# EAGLE board Timer_Module (EAGLE 7.2.0)
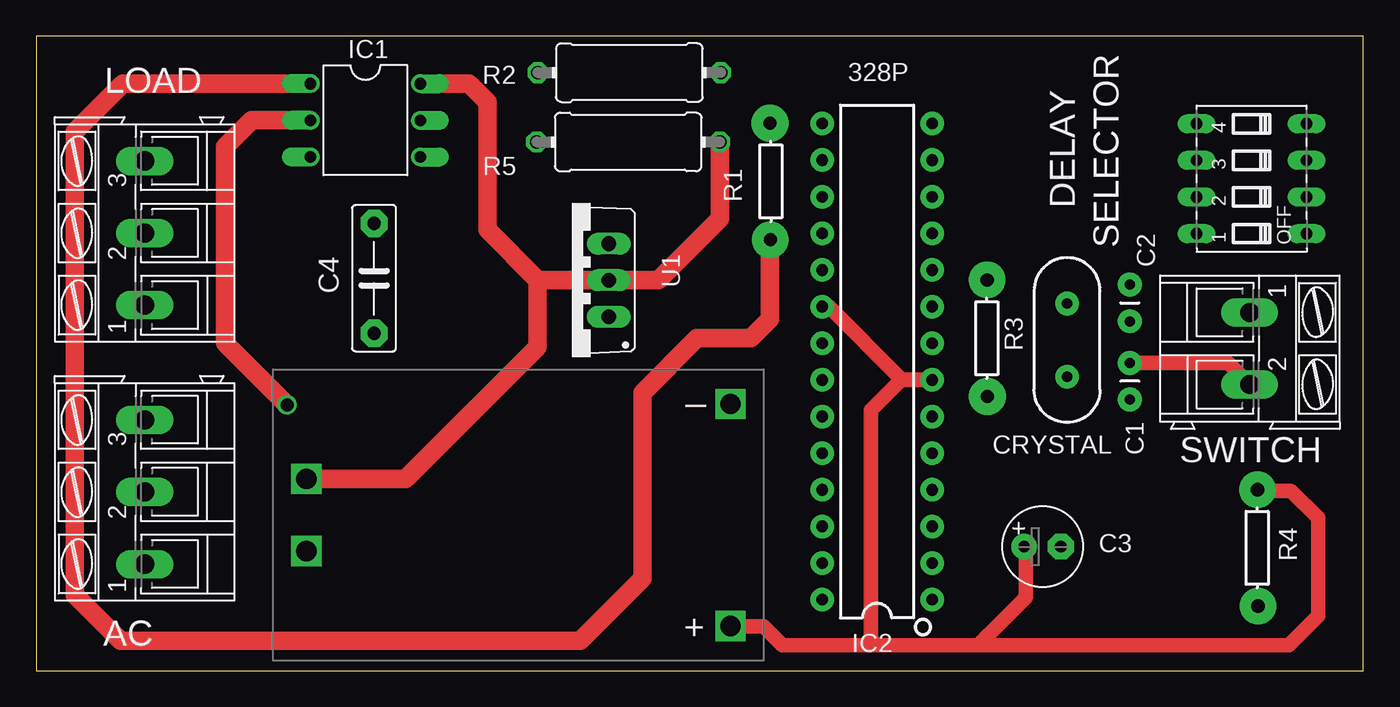
[diagram p0: board, top side]
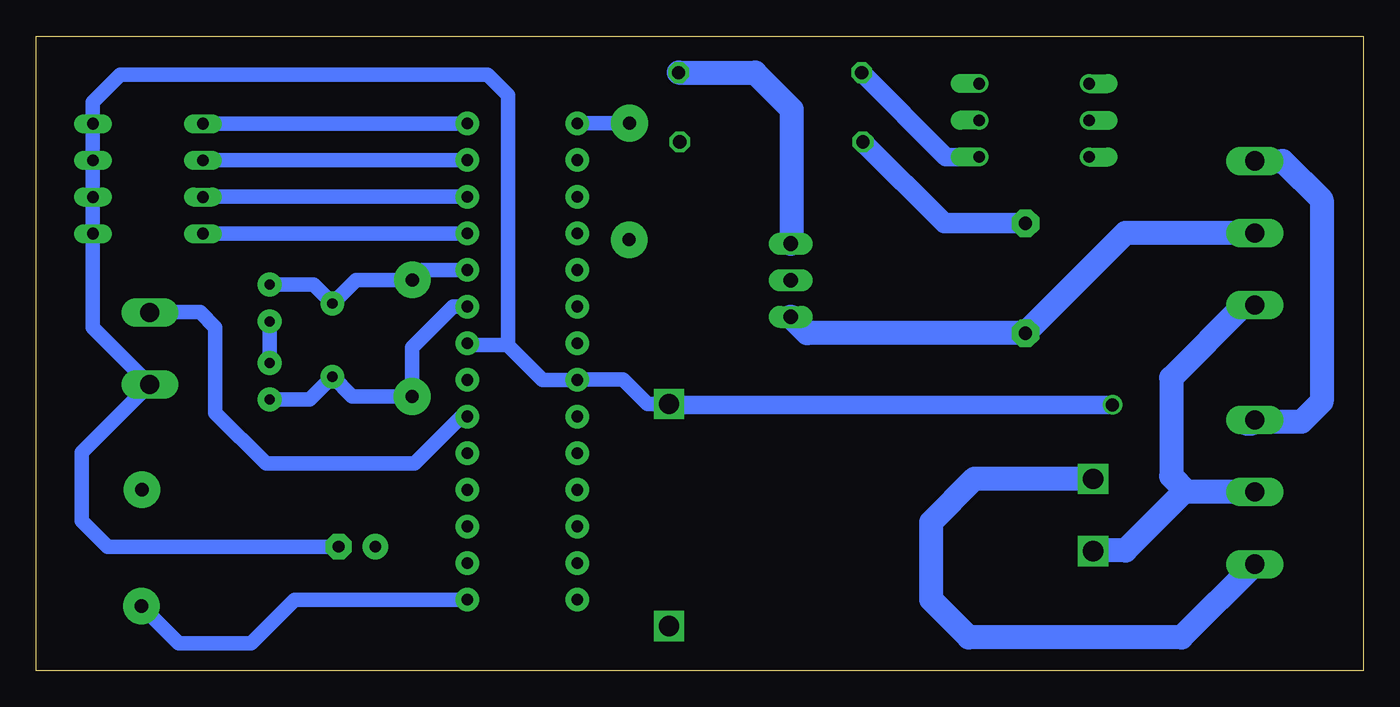
[diagram p1: board, bottom side, seen from below]

Size 92 x 44 mm. Coordinates in mm from the lower left corner, seen from the top.
Outline: 0,0 92,0 92,44 0,44 0,0
Copper layers (1*16): Top 0.035mm / dielectric 1.5mm / Bottom 0.035mm
Design rules "default": minimum track width 10mil, minimum drill 24mil, track to track 8mil, track to pad 8mil, pad to pad 8mil, via to via 8mil, smd to smd 8mil, copper to edge 40mil, drill to drill 8mil, minimum pad ring 10mil, minimum via ring 8mil, stop-mask expansion 4mil, vias tented up to drill 0mil, thermal gap 10mil

## Footprints (pad centres in the part's own frame; a part is rotated, then mirrored left to right if it is on the bottom)
AK300/3 = drill 1.321 long: 1 -5.004,0; 2 0,0; 3 5.004,0
CAP-PTH-2.54 = drill 0.7 pad 1.651: 1 -1.27,0; 2 1.27,0
E2,5-6 = drill 0.813 pad 1.778: + -1.27,0 | drill 0.813 pad 1.778 octagon: - 1.27,0
C7.5B3 = drill 0.914 pad 1.905 octagon: 1 -3.81,0; 2 3.81,0
HC49US = drill 0.7 pad 1.651: 1 -2.54,0; 2 2.54,0
HKLPM01 = drill 1.4 square: P$1 -14.7,2.5; P$2 -14.7,-2.5; P$3 14.7,7.7; P$4 14.7,-7.7
DIL06 = drill 0.813 offset: 1 -2.54,-3.81; 2 0,-3.81; 3 2.54,-3.81; 4 2.54,3.81; 5 0,3.81; 6 -2.54,3.81
DIP28 = drill 0.813 pad 1.626: 1 -16.51,-3.81; 2 -13.97,-3.81; 3 -11.43,-3.81; 4 -8.89,-3.81; 5 -6.35,-3.81; 6 -3.81,-3.81; 7 -1.27,-3.81; 8 1.27,-3.81; 9 3.81,-3.81; 10 6.35,-3.81; 11 8.89,-3.81; 12 11.43,-3.81; 13 13.97,-3.81; 14 16.51,-3.81; 15 16.51,3.81; 16 13.97,3.81; 17 11.43,3.81; 18 8.89,3.81; 19 6.35,3.81; 20 3.81,3.81; 21 1.27,3.81; 22 -1.27,3.81; 23 -3.81,3.81; 24 -6.35,3.81; 25 -8.89,3.81; 26 -11.43,3.81; 27 -13.97,3.81; 28 -16.51,3.81
AXIAL-0.3 = drill 0.914 pad 2.54: P$1 -4.039,-0.051; P$2 4.039,-0.025
0411/12 = drill 0.914 octagon: 1 -6.35,0; 2 6.35,0
DIP04S = drill 0.813 long: 1 -3.81,-3.81; 2 -1.27,-3.81; 3 1.27,-3.81; 4 3.81,-3.81; 5 3.81,3.81; 6 1.27,3.81; 7 -1.27,3.81; 8 -3.81,3.81
AK300/2 = drill 1.321 long: 1 -2.515,0; 2 2.489,0
TO220BV = drill 1.016 long: G 2.54,-2.54; T1 -2.54,-2.54; T2 0,-2.54

## Placement (x,y rotation side)
AC_SUPPLY  [AK300/3]  7.53,12.39 90 top
C1  22pF  [CAP-PTH-2.54]  75.81,20.07 270 top
C2  22pF  [CAP-PTH-2.54]  75.8,25.49 90 top
C3  100uF  [E2,5-6]  69.76,8.6 0 top
C4  10nF  [C7.5B3]  23.43,27.21 90 top
CRYSTAL  16MHz  [HC49US]  71.46,22.92 270 top
HKLP1  HKLPM01  [HKLPM01]  33.43,10.79 0 top
IC1  MOC3031M  [DIL06]  22.83,38.16 270 top
IC2  328P  [DIP28]  58.29,21.43 90 top
LOAD  [AK300/3]  7.53,30.34 90 top
R1  1k  [AXIAL-0.3]  50.92,33.92 270 top
R2  470E  [0411/12]  41.12,41.46 180 top
R3  1m  [AXIAL-0.3]  65.89,23.05 90 top
R4  10k  [AXIAL-0.3]  84.64,8.51 90 top
R5  39E  [0411/12]  41.04,36.66 0 top
SW  [DIP04S]  84.25,34.11 90 top
SWITCH  [AK300/2]  84.12,22.33 270 top
U1  BT138-V  [TO220BV]  37.15,27.07 90 top

## Library data of the parts
AC_SUPPLY LOAD SWITCH = con-ptr500; OC_FARNELL: unknown; OC_NEWARK: unknown
C1 C2 = SparkFun-Capacitors; PROD_ID: CAP-09128
C3 R2 R5 = adafruit
C4 = capacitor-wima
CRYSTAL = SparkFun-Clocks; PROD_ID: XTAL-08181; SF_ID: COM-00536
HKLP1 = HKLPM01
IC1 = optocoupler; MF: FAIRCHILD SEMICONDUCTOR; MPN: MOC3031M; OC_FARNELL: 9875964; OC_NEWARK: 78K6089
IC2 = SparkFun-IC-Microcontroller; PROD_ID: IC-09136
R1 R3 R4 = SparkFun-Resistors; PROD_ID: RES-12182
SW = switch-dil; OC_FARNELL: unknown; OC_NEWARK: unknown
U1 = triac

## Nets
5V: C3.+ HKLP1.P$4 IC2.7 IC2.20 R4.P$2
AC_LIVE: AC_SUPPLY.1 HKLP1.P$1 IC1.6 R5.2 U1.T2
AC_NEUTRAL: AC_SUPPLY.2 HKLP1.P$2 LOAD.1
GND: C1.1 C2.1 C3.- HKLP1.P$3 IC1.2 IC2.8 IC2.22 SW.1 SW.2 SW.3 SW.4 SWITCH.2
N$1: C1.2 CRYSTAL.2 IC2.9 R3.P$1
N$2: IC1.4 R2.2
N$3: R2.1 U1.G
N$4: C4.1 LOAD.2 U1.T1
N$5: IC1.1 R1.P$2
N$6: C2.2 CRYSTAL.1 IC2.10 R3.P$2
N$7: IC2.1 R4.P$1
N$8: C4.2 R5.1
S$1: IC2.14 SW.5
S$2: IC2.13 SW.6
S$3: IC2.12 SW.7
S$4: IC2.11 SW.8
S$5: AC_SUPPLY.3 LOAD.3
TRIG_SWITCH: IC2.6 SWITCH.1
TRIGGER: IC2.15 R1.P$1

## Tracks (layer width: path | path; a pad name or v marks a point on that pad's centre or on a via)
5V
  Top 1.016: HKLP1.P$4 50.4,3.09 51.72,1.77 58.29,1.77 | 58.29,1.77 65.28,1.77 | 65.28,1.77 68.61,5.1 68.61,8.48 C3.+ | IC2.20 54.94,25.24 59.99,20.19 62.07,20.19 IC2.7 59.96,20.16 57.88,18.08 57.88,2.18 58.29,1.77 | 65.28,1.77 86.83,1.77 88.86,3.8 88.86,10.6 86.98,12.48 84.73,12.48 R4.P$2
AC_LIVE
  Top 1.27: U1.T2 39.72,27.1 | 39.72,27.1 43.13,27.1 47.39,31.36 R5.2 | 39.72,27.1 34.93,27.1 | 34.93,27.1 34.77,27.1 31.29,30.58 31.29,39.41 30,40.7 IC1.6 | HKLP1.P$1 25.61,13.29 34.77,22.45 34.77,26.94 34.93,27.1
  Bottom 1.676: AC_SUPPLY.1 7.54,7.39 12.62,2.31 27.35,2.31 29.96,4.92 29.96,10.31 26.95,13.32 18.76,13.32 HKLP1.P$1
AC_NEUTRAL
  Bottom 1.676: LOAD.1 8.3,25.34 13.33,20.31 13.33,13.49 12.28,12.44 7.58,12.44 AC_SUPPLY.2 12.44,12.39 16.5,8.33 18.69,8.33 HKLP1.P$2
GND  (via drill 0.9)
  Top 1.016: C1.1 82.62,21.34 SWITCH.2
  Top 1.27: IC1.2 14.95,38.16 13.11,36.32 13.11,22.72 v17.4,18.43
  Bottom 1.016: HKLP1.P$3 49.61,18.49 51.31,20.19 54.45,20.19 IC2.22 56.91,20.16 59.32,22.57 | 59.32,22.57 61.97,22.57 IC2.8 | 59.32,22.57 59.27,22.62 59.27,39.91 60.69,41.33 86.16,41.33 88.06,39.43 SW.4 SW.3 SW.2 SW.1 88.06,23.78 SWITCH.2 88.82,15.14 88.82,10.39 87.03,8.6 C3.- | C2.1 C1.1
  Bottom 1.27: v17.4,18.43 48.07,18.43 HKLP1.P$3
N$1
  Bottom 1.016: C1.2 73.04,18.8 CRYSTAL.2 70.09,19.01 R3.P$1 65.94,22.39 63.09,25.24 IC2.9
N$2
  Bottom 1.27: IC1.4 28.93,35.62 R2.2
N$3
  Bottom 1.676: R2.1 42.16,41.46 39.63,38.93 39.63,29.67 U1.G
N$4
  Bottom 1.676: U1.T1 38.56,23.4 C4.1 16.49,30.34 LOAD.2
N$5
  Top 1.27: IC1.1 6,40.7 2.68,37.38 2.68,5.27 5.87,2.08 37.71,2.08 42.02,6.39 42.02,19.25 45.82,23.05 49.55,23.05 50.88,24.38 50.88,29.87 R1.P$2
N$6
  Bottom 1.016: IC2.10 65.22,27.78 R3.P$2 69.83,27.09 CRYSTAL.1 72.76,26.76 C2.2
N$7
  Bottom 1.016: IC2.1 74.08,4.92 77.09,1.91 82.13,1.91 R4.P$1
N$8
  Bottom 1.422: C4.2 29.05,31.02 R5.1
S$1
  Bottom 1.016: IC2.14 80.42,37.94 SW.5
S$2
  Bottom 1.016: IC2.13 80.42,35.4 SW.6
S$3
  Bottom 1.016: IC2.12 80.42,32.86 SW.7
S$4
  Bottom 1.016: IC2.11 80.42,30.32 SW.8
S$5
  Bottom 1.676: LOAD.3 5.59,35.34 2.9,32.65 2.9,18.66 4.3,17.26 7.94,17.26 8.06,17.14 7.78,17.14 AC_SUPPLY.3
TRIG_SWITCH
  Bottom 1.016: IC2.6 62.51,17.62 65.77,14.36 76.07,14.36 79.58,17.87 79.58,23.8 80.63,24.85 SWITCH.1
TRIGGER
  Bottom 1.016: R1.P$1 54.46,37.96 IC2.15

## Text on the board
tNames: LOAD | DELAY | SELECTOR | _ | CRYSTAL | SWITCH | AC | +